# Altium PCB 32X35雷达微动一体板V0.6.PcbDoc (part 1 of 2)
Units mil, origin at the board's own origin, x right, y up, seen from the top; angles counter-clockwise.
Board outline 1258.74 x 1380 mil, 2 copper layers (Top Layer, Bottom Layer); 54 components, 40 nets, 229 pads, 39 vias.
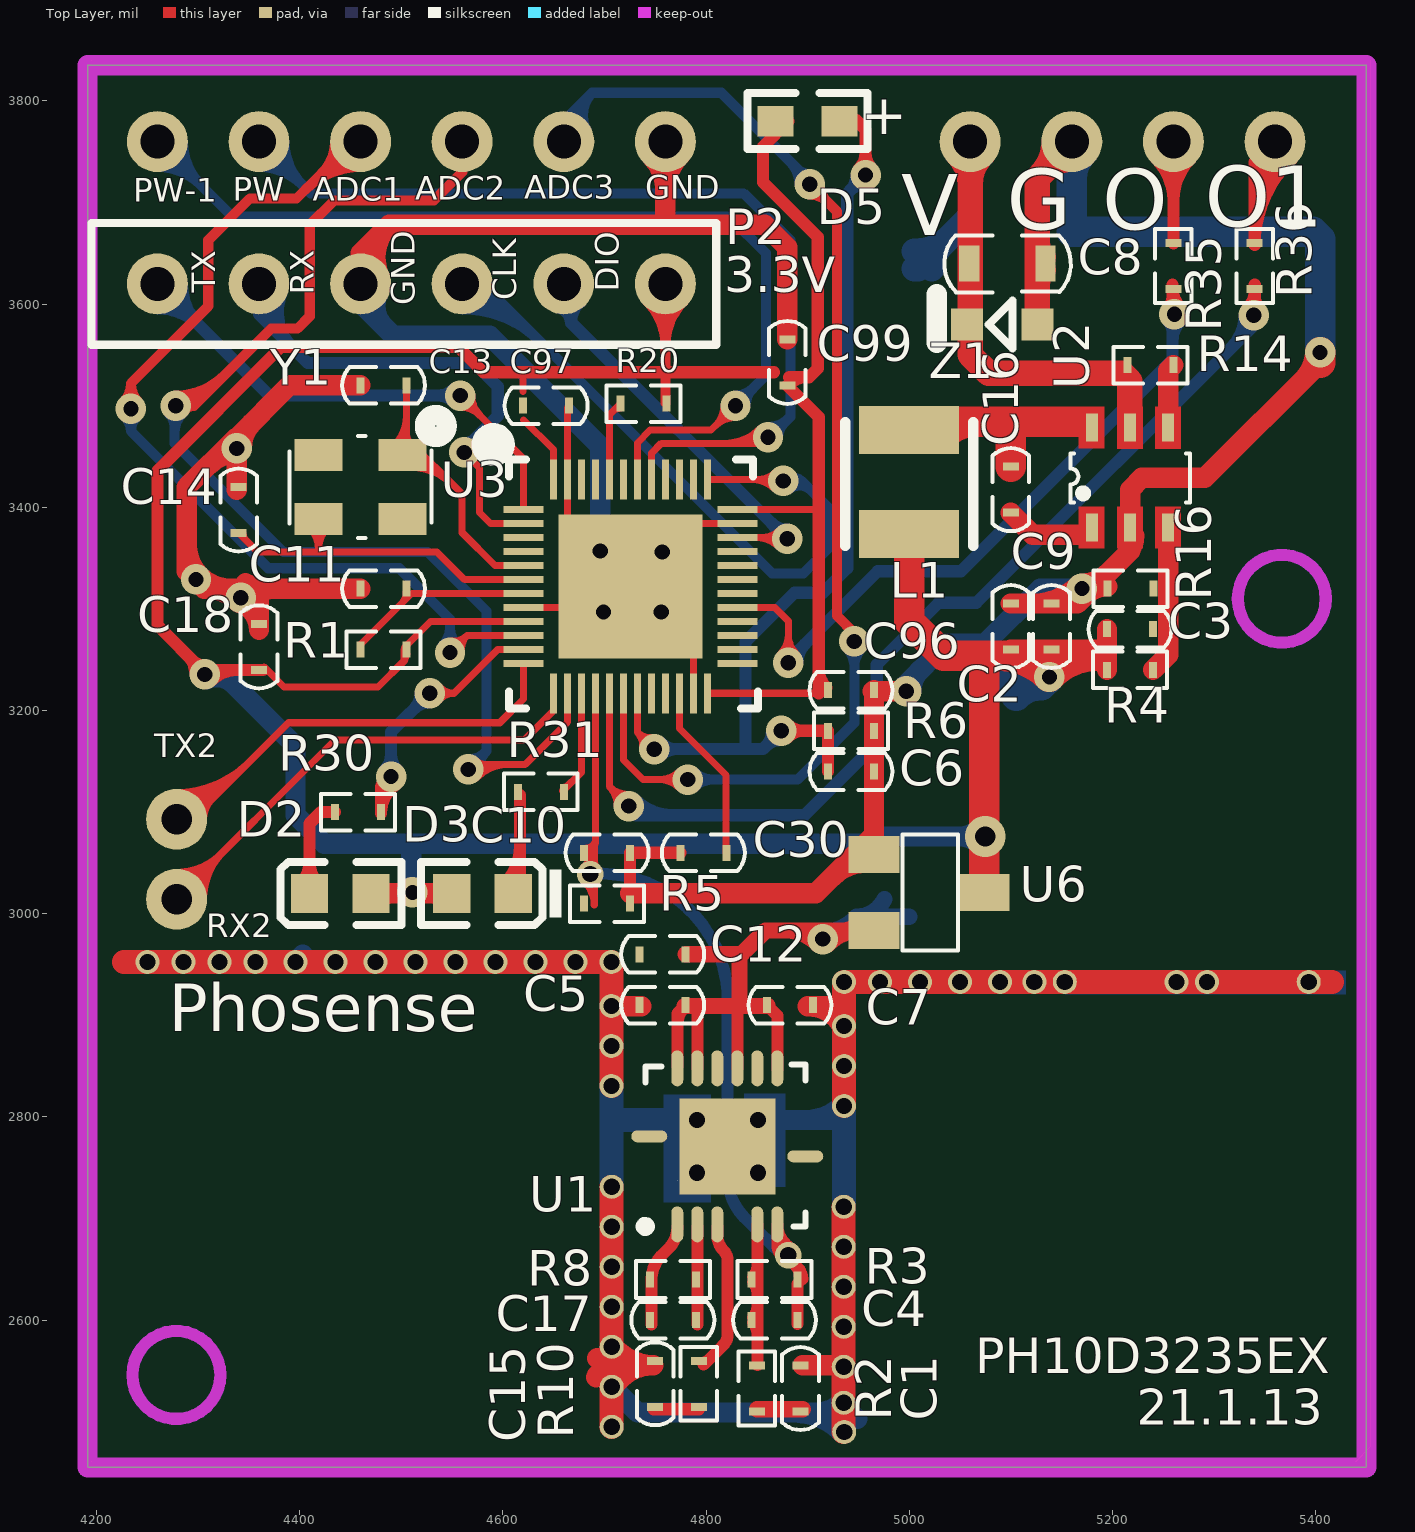
[diagram p0: Top Layer view]
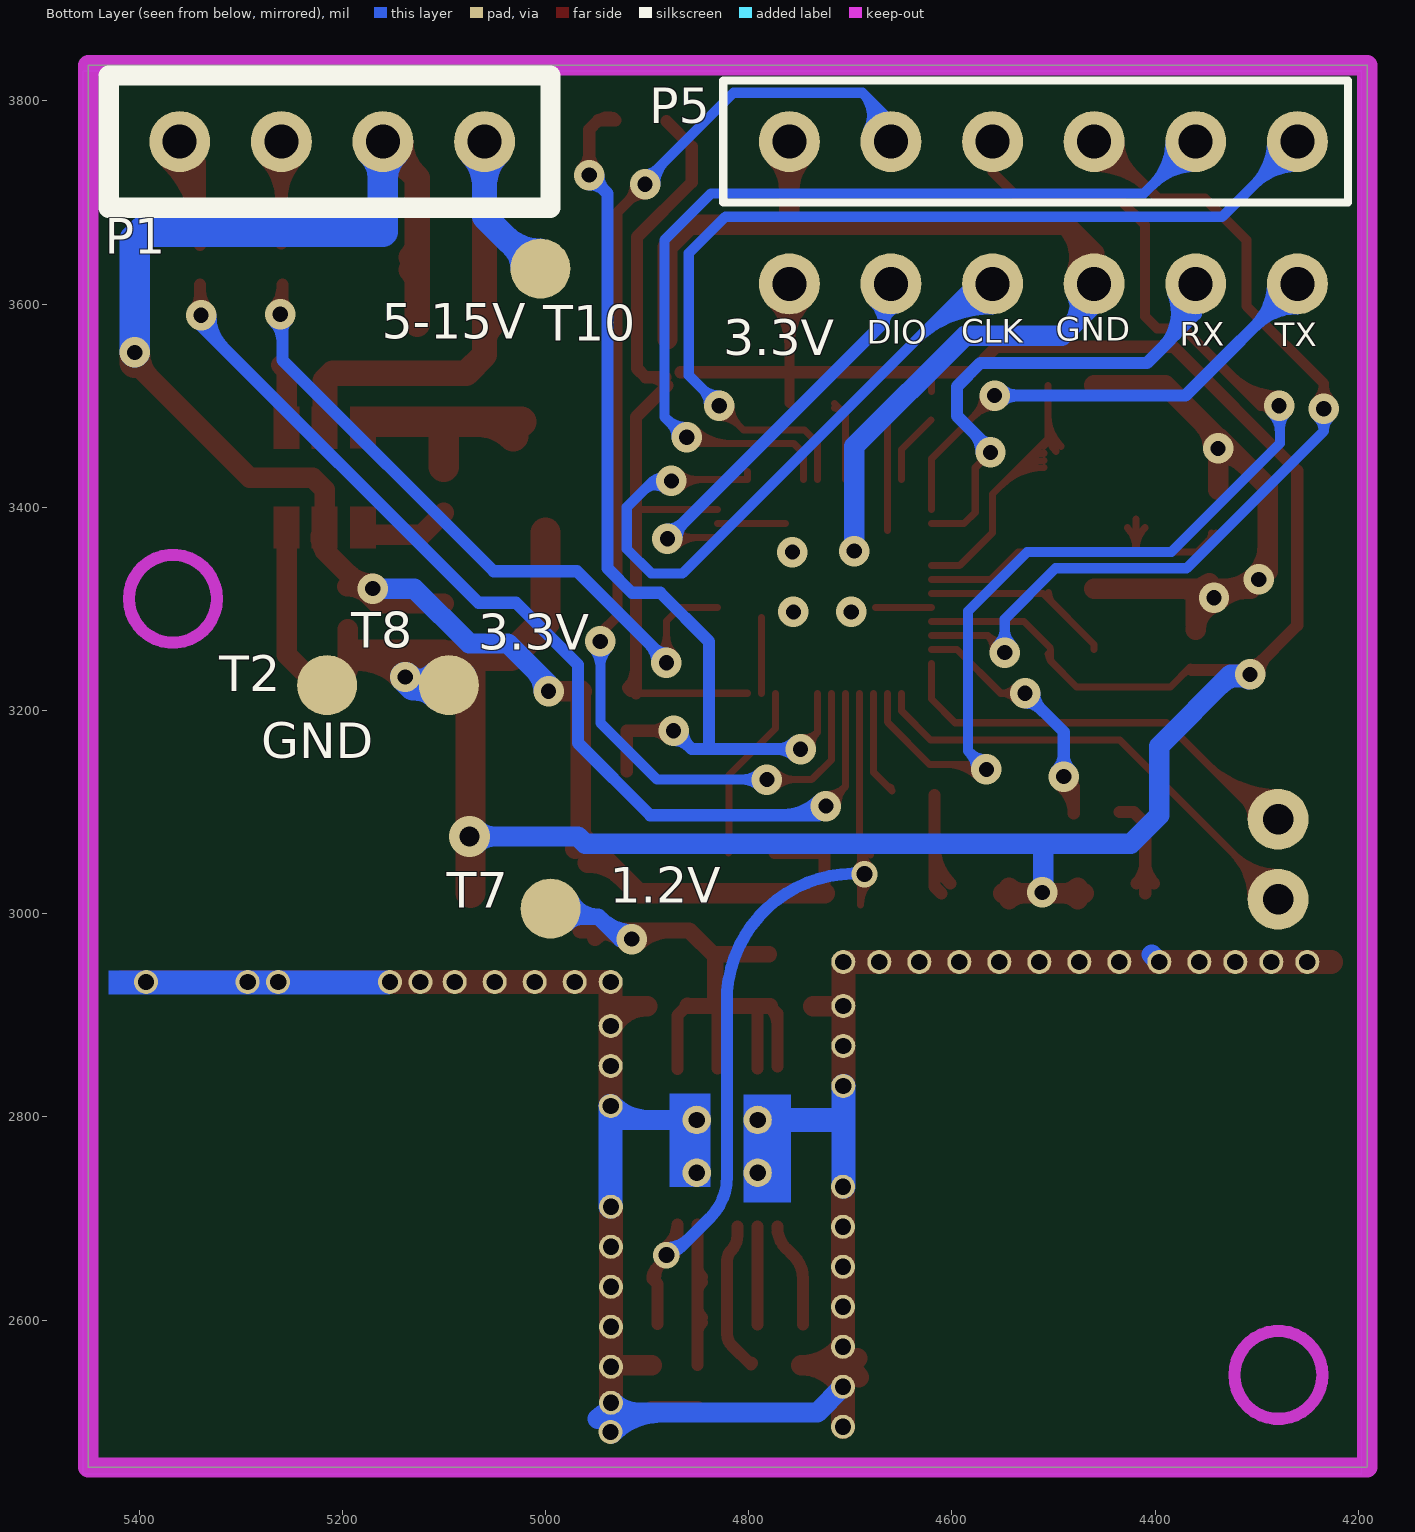
[diagram p1: Bottom Layer view, seen from below]

## Layer stack, top to bottom
Top Layer: signal copper 1.4
Dielectric: dielectric 12.6, FR-4, Dk 4.8
Bottom Layer: signal copper 1.4

## Board outline
4191.26,3835 5450,3835 5450,2455 4191.26,2455 4191.26,3835

## Design rules (kind name [scope] priority, off if disabled: settings)
Clearance [All] p0: scope1count=1 scope1_0_kind=Board scope1_0_value=Board scope2count=1 scope2_0_kind=Board scope2_0_value=Board commentlength=0 gap=6
Clearance Clearance_1 [All] p0: scope1count=1 scope1_0_kind=Net scope1_0_value=GND scope2count=1 scope2_0_kind=Layer scope2_0_value=TOP commentlength=0 gap=10
Clearance Clearance_1 [InNet('GND') vs OnLayer('Keep-Out Layer')] p1: gap=10
Clearance [All] p2: gap=6
ComponentClearance [All] p0: scope1count=1 scope1_0_kind=Board scope1_0_value=Board scope2count=1 scope2_0_kind=Board scope2_0_value=Board commentlength=0 gap=10 collisioncheckmode=3
ComponentClearance [All] p1: gap=10 collisioncheckmode=3 verticalgap=10
DiffPairsRouting [All] p0: scope1count=1 scope1_0_kind=Board scope1_0_value=Board scope2count=1 scope2_0_kind=Board scope2_0_value=Board commentlength=0
FanoutControl Fanout_BGA [All] p0 off: scope1count=1 scope1_0_kind=Board scope1_0_value=Board scope2count=1 scope2_0_kind=Board scope2_0_value=Board commentlength=69 // Protel DXP Scope 1 Expression Was: IsBGA   Fanout_BGA (Default Rule)
FanoutControl Fanout_LCC [All] p0 off: scope1count=1 scope1_0_kind=Board scope1_0_value=Board scope2count=1 scope2_0_kind=Board scope2_0_value=Board commentlength=69 // Protel DXP Scope 1 Expression Was: IsLCC   Fanout_LCC (Default Rule)
FanoutControl Fanout_SOIC [All] p0 off: scope1count=1 scope1_0_kind=Board scope1_0_value=Board scope2count=1 scope2_0_kind=Board scope2_0_value=Board commentlength=71 // Protel DXP Scope 1 Expression Was: IsSOIC   Fanout_SOIC (Default Rule)
FanoutControl Fanout_Small [All] p0 off: scope1count=1 scope1_0_kind=Board scope1_0_value=Board scope2count=1 scope2_0_kind=Board scope2_0_value=Board commentlength=84 // Protel DXP Scope 1 Expression Was: (CompPinCount < 5)   Fanout_Small (Default Rule)
FanoutControl Fanout_Default [All] p0: scope1count=1 scope1_0_kind=Board scope1_0_value=Board scope2count=1 scope2_0_kind=Board scope2_0_value=Board commentlength=30 // Fanout_Default (Default Rule)
Height [All] p0: scope1count=1 scope1_0_kind=Board scope1_0_value=Board scope2count=1 scope2_0_kind=Board scope2_0_value=Board commentlength=0
HoleSize [All] p0: scope1count=1 scope1_0_kind=Board scope1_0_value=Board scope2count=1 scope2_0_kind=Board scope2_0_value=Board commentlength=0 absolutevalues=TRUE maxlimit=100 minlimit=1 maxpercent=80.000 minpercent=20.000
LayerPairs [All] p0: scope1count=1 scope1_0_kind=Board scope1_0_value=Board scope2count=1 scope2_0_kind=Board scope2_0_value=Board commentlength=0 enforce=TRUE
PasteMaskExpansion [All] p0: scope1count=1 scope1_0_kind=Board scope1_0_value=Board scope2count=1 scope2_0_kind=Board scope2_0_value=Board commentlength=0 expansion=0
PlaneClearance [All] p0: scope1count=1 scope1_0_kind=Board scope1_0_value=Board scope2count=1 scope2_0_kind=Board scope2_0_value=Board commentlength=0 clearance=20
PlaneConnect [All] p0: scope1count=1 scope1_0_kind=Board scope1_0_value=Board scope2count=1 scope2_0_kind=Board scope2_0_value=Board commentlength=0 planeconnectstyle=Direct reliefexpansion=20 reliefentries=4 reliefconductorwidth=10 reliefairgap=10
PlaneConnect [All] p1: planeconnectstyle=Direct reliefexpansion=20 reliefentries=4 reliefconductorwidth=10 reliefairgap=10
PolygonConnect [All] p0: scope1count=1 scope1_0_kind=Board scope1_0_value=Board scope2count=1 scope2_0_kind=Board scope2_0_value=Board commentlength=0 connectstyle=Direct reliefconductorwidth=10 reliefentries=4 polygonreliefangle="90 Angle"
PolygonConnect [All] p1: connectstyle=Direct reliefconductorwidth=10 reliefentries=4 polygonreliefangle="90 Angle"
RoutingCorners [All] p0: scope1count=1 scope1_0_kind=Board scope1_0_value=Board scope2count=1 scope2_0_kind=Board scope2_0_value=Board commentlength=0 cornerstyle=45-Degree minsetback=100 maxsetback=100
RoutingLayers [All] p0: scope1count=1 scope1_0_kind=Board scope1_0_value=Board scope2count=1 scope2_0_kind=Board scope2_0_value=Board commentlength=0 top layer=Automatic bottom layer=Automatic
RoutingPriority [All] p0: scope1count=1 scope1_0_kind=Board scope1_0_value=Board scope2count=1 scope2_0_kind=Board scope2_0_value=Board commentlength=0
RoutingTopology [All] p0: scope1count=1 scope1_0_kind=Board scope1_0_value=Board scope2count=1 scope2_0_kind=Board scope2_0_value=Board commentlength=0 topology=Shortest
RoutingVias [All] p0: scope1count=1 scope1_0_kind=Board scope1_0_value=Board scope2count=1 scope2_0_kind=Board scope2_0_value=Board commentlength=0 holewidth=28 width=50 viastyle="Through Hole" minholewidth=15 minwidth=24 maxholewidth=28 maxwidth=50
RoutingVias [All] p1: holewidth=28 width=50 viastyle="Through Hole" minholewidth=15 minwidth=24 maxholewidth=28 maxwidth=50
ShortCircuit [All] p0: scope1count=1 scope1_0_kind=Board scope1_0_value=Board scope2count=1 scope2_0_kind=Board scope2_0_value=Board commentlength=0 allowed=FALSE
SolderMaskExpansion [All] p0: scope1count=1 scope1_0_kind=Board scope1_0_value=Board scope2count=1 scope2_0_kind=Board scope2_0_value=Board commentlength=0 expansion=4
SolderMaskExpansion [All] p1: expansion=4
TestPointUsage [All] p0: scope1count=1 scope1_0_kind=Board scope1_0_value=Board scope2count=1 scope2_0_kind=Board scope2_0_value=Board commentlength=0 valid=0 allowmultiple=FALSE
TestPointUsage [All] p1: valid=0 allowmultiple=FALSE
Testpoint [All] p0: scope1count=1 scope1_0_kind=Board scope1_0_value=Board scope2count=1 scope2_0_kind=Board scope2_0_value=Board commentlength=0 side=15 testpointundercomponent=TRUE minsize=40 maxsize=100 preferedsize=60 minholesize=0 maxholesize=40 preferedholesize=32 testpointgrid=1 style=1023 order=0123456789
Testpoint [All] p1: side=15 testpointundercomponent=TRUE minsize=40 maxsize=100 preferedsize=60 minholesize=0 maxholesize=40 preferedholesize=32 testpointgrid=1 style=1023 order=0123456789
UnRoutedNet [All] p0: scope1count=1 scope1_0_kind=Board scope1_0_value=Board scope2count=1 scope2_0_kind=Board scope2_0_value=Board commentlength=0
Width [All] p0: scope1count=1 scope1_0_kind=Board scope1_0_value=Board scope2count=1 scope2_0_kind=Board scope2_0_value=Board commentlength=0 maxlimit=90 minlimit=7 preferedwidth=10
Width [All] p1: maxlimit=90 minlimit=7 preferedwidth=10
17 further rules are at their usual default settings.

## Components (designator, comment, footprint, x,y, rotation, side; value= is the part's Value field where it differs from the comment)
C1 "10uF" C0402 4893,2510 r90 top
C2 "10uF" C0402 5100,3260 r90 top
C3 "22pF" C0402 5240,3280 r180 top
C4 "1nF/NA" C0402 4890,2600 r180 top
C5 "0.5pF" C0402 4780,2910 r180 top
C6 "0.1uF" C0402 4920,3140 r0 top
C7 "0.1uF" C0402 4860,2910 r0 top
C8 "10uF/16V" C0603 5060,3640 r0 top
C9 "10uF" C0402 5140,3260 r90 top
C10 "0.1uF" C0402 4680,3060 r0 top
C11 "100nF" C0402 4460,3320 r0 top
C12 "10uF" C0402 4780,2960 r180 top
C13 "12pF" C0402 4460,3520 r0 top
C14 "12pF" C0402 4340,3420 r270 top
C15 "1nF" C0402 4750,2560 r270 top
C16 "0.1uF" C0402 5100,3440 r270 top
C17 "1nF" C0402 4790,2600 r180 top
C18 "10uF/6.3V" C0402 4360,3240 r90 top
C30 "100nF" C0402 4820,3060 r180 top
C96 "0.1uF/50V" C0402 4920,3220 r0 top
C97 "0.1uF/50V" C0402 4620,3500 r0 top
C99 "0.1uF/50V" C0402 4880,3520 r90 top
D2 "红灯" LC-0603_LED_S1 4440,3020 r0 top
D3 "绿灯" LC-0603_LED_S1 4580,3020 r180 top
D5 "PT19-21C" LED-0603 4900,3780 r180 top
L1 "PRS3015-100MT" PRS3015 5000,3480 r270 top
P1 "DIP1X4-2.54mm" DIP1X4-2.54mm 5060,3760 r0 bottom
P2 "DIP1X6-2.54mm" DIP1X6-2.54 4760,3620 r180 top
P5 "DIP1X6-2.54mm" DIP1X6-2.54 4260,3760 r0 bottom
R1 "4.7KΩ" R0402 4460,3260 r0 top
R2 "10K" R0402 4850,2510 r90 top
R3 "5.1M" R0402 4890,2640 r180 top
R4 "100K" R0402 5240,3240 r180 top
R5 "47k" R0402 4680,3010 r0 top
R6 "47k" R0402 4920,3180 r0 top
R8 "5.1k" R0402 4790,2640 r180 top
R10 "5.1k" R0402 4793,2560 r270 top
R14 "47k" R0402 5260,3540 r180 top
R16 "22.1K" R0402 5195,3320 r0 top
R20 "4.7K" R0402 4761,3502 r180 top
R30 "1KΩ" R0402 4480,3100 r180 top
R31 "1KΩ" R0402 4660,3120 r180 top
R35 "100R" R0402 5260,3660 r270 top
R36 "100R" R0402 5340,3615 r90 top
T2 "" TestPoints 5220,3220 r180 bottom
T7 "" TestPoints 5000,3000 r180 bottom
T8 "" TestPoints 5100,3220 r180 bottom
T10 "" TestPoints 5000,3640 r0 bottom
U1 "XBR816C" XBR816 4939,2712 r90 top locked
U2 "SY8120B1ABC" SOT-23-6 5180,3380 r90 top
U3 "HC32F460JEUA-QFN48TR" QFN48-5X5mm 4621,3322 r0 top
U6 "ME6216A12M3G" SOT-23-L 4965.28,3058.28 r0 top
Y1 "8MHZ-1C208000CE0R" OSC-SMD_3225 4460,3420 r180 top
Z1 "SESD3Z15C" SOD323 5045,3580 r0 top

## Footprints (in the part's own frame and the unit in brackets; to place one, negate y for a bottom-side part, rotate by r counter-clockwise, add the part's x,y. Pads: shape width x height; smd on the part's side, far side on the other; paste and mask are expansions set on the pad)
C0402 [mm]
  rect 0.2x0.4 smd: 1(0,0) 2(1.15,0)
  silkscreen extent -0.46,-0.46 1.61,0.46
C0603 [mil]
  rect 19.8x35.55 smd: 1(-0.92,0) 2(74,0)
  silkscreen extent -25,-28 99,28
DIP1X4-2.54mm [mil]
  round 60 hole 33.46: 1(0,0) 2(100,0) 3(200,0) 4(300,0)
  silkscreen extent -65,-65 370,65
DIP1X6-2.54 [mil]
  round 60 hole 33.46: 1(0,0) 2(100,0) 3(200,0) 4(300,0) 5(400,0) 6(500,0)
  silkscreen extent -50,-60 565,60
LC-0603_LED_S1 [mm]
  rect 0.93x0.98 smd: A(0.77,0) K(-0.77,0)
  silkscreen extent -1.5,-0.79 1.54,0.79
LED-0603 [mm]
  rect 0.9x0.762 smd: 1(-0.8,0) 2(0.8,0)
  silkscreen extent -1.5,-0.7 1.5,0.7
OSC-SMD_3225 [mm] "OSC-SMD-3225"
  rect 1.2x0.8 smd: 1(-1.05,-0.8) 2(1.05,-0.8) 3(1.05,0.8) 4(-1.05,0.8)
  silkscreen extent -1.98,-1.37 1.78,1.27
PRS3015 [mm]
  rect 1.2x2.5 smd: 1(0.1,0) 2(2.7,0)
  silkscreen extent -0.1,-1.6 3,1.6
QFN48-5X5mm [mm] "QFN48-5X5mm"
  rect 1x0.18 smd: 1(-0.02,1.925) 2(-0.02,1.575) 3(-0.02,1.225) 4(-0.02,0.875) 5(-0.02,0.525) 6(-0.02,0.175) 7(-0.02,-0.175) 8(-0.02,-0.525) 9(-0.02,-0.875) 10(-0.02,-1.225) 11(-0.02,-1.575) 12(-0.02,-1.925) 25(5.33,-1.925) 26(5.33,-1.575) 27(5.33,-1.225) 28(5.33,-0.875) 29(5.33,-0.525) 30(5.33,-0.175) 31(5.33,0.175) 32(5.33,0.525) 33(5.33,0.875) 34(5.33,1.225) 35(5.33,1.575) 36(5.33,1.925)
  rect 0.18x1 smd: 13(0.73,-2.675) 14(1.08,-2.675) 15(1.43,-2.675) 16(1.78,-2.675) 17(2.13,-2.675) 18(2.48,-2.675) 19(2.83,-2.675) 20(3.18,-2.675) 21(3.53,-2.675) 22(3.88,-2.675) 23(4.23,-2.675) 24(4.58,-2.667) 37(4.58,2.675) 38(4.23,2.675) 39(3.88,2.675) 40(3.53,2.675) 41(3.18,2.675) 42(2.83,2.675) 43(2.48,2.675) 44(2.13,2.675) 45(1.78,2.675) 46(1.43,2.675) 47(1.08,2.675) 48(0.73,2.675)
  rect 3.6x3.6 smd: 49(2.655,0)
  silkscreen extent -1.07,-3.05 5.84,3.7
R0402 [mm]
  rect 0.2x0.4 smd: 1(0,0) 2(1.15,0)
  silkscreen extent -0.35,-0.46 1.5,0.46
SOD323 [mm]
  rect 0.8x0.8 smd: A(2.06,0) K(0.3,0)
  silkscreen extent 0.84,-0.6 1.44,0.6
SOT-23-6 [mm]
  rect 0.7x0.3 smd: 1(0,0) 2(0,-0.95) 3(0,-1.9) 4(2.5,-1.9) 5(2.5,-0.95) 6(2.5,0)
  Top Layer region: 1.972,-2.226 3.025,-2.226 3.025,-1.573 1.972,-1.573
  Top Layer region: 1.972,-1.276 3.025,-1.276 3.025,-0.623 1.972,-0.623
  Top Layer region: 1.974,-0.313 3.027,-0.313 3.027,0.34 1.974,0.34
  Top Layer region: -0.527,-2.226 0.526,-2.226 0.526,-1.573 -0.527,-1.573
  Top Layer region: -0.527,-1.276 0.526,-1.276 0.526,-0.623 -0.527,-0.623
  Top Layer region: -0.526,-0.313 0.527,-0.313 0.527,0.34 -0.526,0.34
  silkscreen extent 0.63,-2.45 1.86,0.54
SOT-23-L [mil]
  rect 50x36 smd: 1(0,0) 2(0,-74.8) 3(108.54,-37.4)
  silkscreen extent 28,-94 83,20
TestPoints [mil] "TestPoints"
  round 59.06 smd: 1(5,5)
XBR816 [mm] "QFN24"
  oval 0.9x0.3 smd: 1(-0.45,4.25) 2(-0.45,3.75) 3(-0.45,3.25) 5(-0.45,2.25) 6(-0.45,1.75) 13(3.45,1.75) 14(3.45,2.25) 15(3.45,2.75) 16(3.45,3.25) 17(3.45,3.75) 18(3.45,4.25)
  oval 0.3x0.9 smd: 10(1.25,1.05) 21(1.75,4.95)
  rect 2.4x2.4 smd: 25(1.5,3)
  silkscreen extent -0.61,1.05 3.55,5.16

## Part data
C1 C2 C3 C4 C5 C6 C7 C8 C9 C10 C12 C15 C16 C17 C30: library part Cap, "Capacitor"
C11: library part "0402 100nF (104) 10% 16V", "贴片电容"
C13 C14: library part "0402 22pF (220) 5% 50V", "贴片电容"
C18 C96 C97 C99: library part "0402 2.2nF (222) 10% 50V", "贴片电容"
D2 D3: library part "0603 红灯", "发光二极管"
D5: library part "Photo Sen", "Photosensitive Diode"
L1: library part Inductor, "Inductor"
P1: library part DIP4-2.54mm
R1 R35 R36: library part "0402 4.7KΩ (4701) 1%", "贴片电阻"
R2 R3 R4 R5 R6 R8 R10 R14 R16 R20: library part Res2, "Resistor"
R30 R31: library part "0402 1KΩ (1001) 1%", "贴片电阻"
T2 T7 T8 T10: library part TestPoints, "TestPoints"
U1: library part XBR1000_24_1
U2: library part H9108
U3: library part HC32F460JETA-LQFP48
U6: library part SSP6206
Y1: library part "SMD-3225_4P  25MHZ 12PF 10PPM", "贴片晶振"
Z1: library part "D Zener", "Zener Diode"

## Free pads (board coordinates)
  round 60 hole 30: 0(4279,3093) 1(4279,3014.26)
  round 23.62 hole 16: 1(4250.17,2952.5) 1(4285.61,2952.5) 1(4321.06,2952.5) 1(4356.49,2952.5) 1(4395.86,2952.5) 1(4435.23,2952.5) 1(4474.6,2952.5) 1(4513.97,2952.5) 1(4553.34,2952.5) 1(4592.71,2952.5) 1(4632.08,2952.5) 1(4671.45,2952.5) 1(4706.88,2830.45) 1(4706.88,2869.82) 1(4706.88,2909.19) 1(4706.88,2952.5) 1(4707.2,2495.02) 1(4707.2,2534.39) 1(4707.2,2573.76) 1(4707.2,2613.13) 1(4707.2,2652.5) 1(4707.2,2691.87) 1(4707.2,2731.24) 1(4935.54,2518.64) 1(4935.54,2554.07) 1(4935.54,2593.44) 1(4935.54,2632.81) 1(4935.54,2672.18) 1(4935.54,2711.55) 1(4935.86,2932.81) 1(4935.86,2810.76) 1(4935.86,2850.13) 1(4935.86,2889.5) 1(4936,2490) 1(4971.29,2932.8) 1(5010.66,2932.8) 1(5050.03,2932.8) 1(5089.4,2932.81) 1(5123.17,2932.81) 1(5153.17,2932.81) 1(5263.17,2932.81) 1(5293.17,2932.81) 1(5393.17,2932.81)
  round 28 hole 16: 1(4791.2,2745.02) 1(4791.2,2797.02) 1(4851.17,2745.02) 1(4851.17,2797.02)

## Via types
v1: diameter 30, hole 15, Top Layer to Bottom Layer, 36 vias
v2: diameter 26, hole 16, Top Layer to Bottom Layer, tented both sides, 2 vias
v3: diameter 40, hole 20, Top Layer to Bottom Layer, 1 vias

## Nets (pads, with @x,y where several pads share a name; then routed paths per layer and width w, separated by ;. In a path a pad name is that pad's centre, name@x,y a point inside that pad or via, vN(x,y) a via of type N, cw(c..) or ccw(c..) an arc to the next point about the centre after c; other vN are vias at no path point)
1.2V: C5.1 C7.1 C12.1 T7.1 U1.13 U1.15 U1.17 U1.18 U6.2 | length 1130
  Top Layer w11.8: U1.18@4771.79,2849.74 4771.79,2901.79 C5.1@4779.02,2909.02 ; U1.17@4791.47,2847.83 4791.47,2909.02 ; U1.15@4830.84,2847.83 4830.84,2909.02 ; C7.1@4860.37,2909.63 4870.21,2899.79 U1.13@4870.21,2847.38 ; 4771.79,2890.98 cw(c4795.09,2890.98) 4778.61,2907.45 ccw(c4795.09,2890.98) 4771.79,2890.98 ; 4771.79,2896.8 cw(c4783.73,2896.8) 4779.27,2907.88 ccw(c4783.73,2896.8) 4771.79,2896.8
  Top Layer w15.75: C5.1@4779.02,2909.02 4859.76,2909.02 C7.1@4860.37,2909.63
  Top Layer w16: C12.1@4780,2960 4831,2960 ; 4833,2909.02 4833,2958 4858.47,2983.47 U6.2@4965.28,2983.47 ; 4934.13,2983.47 ccw(c4934.13,3007.61) 4951.2,2990.54 cw(c4934.13,3007.61) 4934.13,2983.47 ; 4934.13,2983.47 cw(c4934.13,2959.33) 4951.2,2976.4 ccw(c4934.13,2959.33) 4934.13,2983.47 ; 4877.65,2983.47 cw(c4877.65,2937.65) 4910.05,2970.05 ccw(c4877.65,2937.65) 4877.65,2983.47 ; v1@4919.95,2970.05 cw(c4952.35,2937.65) 4952.35,2983.47 ccw(c4952.35,2937.65) v1@4919.95,2970.05
  Bottom Layer w16: v1(4915,2975) 4926,2975 4948,2997 ; T7.1@5000,2997 4948,2997 ; 4948,2997 ccw(c4948,3027.64) 4975.61,3014.34 cw(c4948,3027.64) 4948,2997 ; v1@4915,2982 ccw(c4915,3025.46) 4945.73,2994.73 cw(c4915,3025.46) v1@4915,2982 ; 4962.34,2997 cw(c4962.34,2972.34) 4979.78,2989.78 ccw(c4962.34,2972.34) 4962.34,2997
3.3V: C2.1 C3.2 C9.1 C18.1 C96.1 C97.1 C99.1 D2.A D3.A D5.2 L1.2 P2.1 R1.2 R4.2 R20.1 T8.1 U3.9 U3.24 U3.36 U3.48 U6.3 | length 5125.4
  Top Layer w7: C18.1@4365,3243 4384.76,3223.24 4477.24,3223.24 4503,3249 R1.2@4503,3260 ; R1.2@4503.32,3261.95 4528.93,3287.55 U3.9@4620.2,3287.55 ; 4620,3513.86 4620,3533 ; 4620.47,3486.1 4649.74,3456.83 U3.48@4649.74,3427.32 ; U3.24@4801.31,3217 4911,3217 ; U3.36@4830.84,3397.79 4904,3397.79 ; C96.1@4917,3217 C96.1@4920,3220 ; C18.1@4363.94,3239.56 cw(c4363.94,3228.7) 4371.62,3236.38 ccw(c4363.94,3228.7) C18.1@4363.94,3239.56 ; 4501.14,3247.14 ccw(c4492.23,3256.06) 4504.84,3256.06 cw(c4492.23,3256.06) 4501.14,3247.14 ; 4503,3249.51 cw(c4511.82,3249.51) 4505.58,3255.75 ccw(c4511.82,3249.51) 4503,3249.51
  Top Layer w10: R20.1@4760,3503 P2.1@4760,3620 ; 4760,3559.64 ccw(c4699.64,3559.64) 4742.32,3602.32 cw(c4699.64,3559.64) 4760,3559.64 ; 4760,3559.64 cw(c4820.36,3559.64) 4777.68,3602.32 ccw(c4820.36,3559.64) 4760,3559.64 ; 4760,3583.79 ccw(c4723.79,3583.79) 4749.39,3609.39 cw(c4723.79,3583.79) 4760,3583.79 ; 4760,3583.79 cw(c4796.21,3583.79) 4770.61,3609.39 ccw(c4796.21,3583.79) 4760,3583.79
  Top Layer w12: C18.1@4364,3240 4304,3240 4260,3284 4260,3436 4382,3558 4556,3558 4581,3533 4867,3533 ; C99.1@4880,3520 4911,3489 4911,3217 ; D5.2@4881,3780 4856,3755 4856,3720 4910,3666 4910,3536.57 4901.43,3528 4882,3528 ; 4289.72,3254.28 cw(c4270.94,3235.5) 4297.5,3235.5 ccw(c4270.94,3235.5) 4289.72,3254.28 ; 4294.55,3249.45 ccw(c4306.5,3261.4) 4306.5,3244.5 cw(c4306.5,3261.4) 4294.55,3249.45 ; v1@4312.86,3229.14 cw(c4339.09,3202.91) 4339.09,3240 ccw(c4339.09,3202.91) v1@4312.86,3229.14 ; C99.1@4882.48,3521.46 cw(c4898.27,3505.67) 4898.27,3528 ccw(c4898.27,3505.67) C99.1@4882.48,3521.46 ; 4911,3240.68 ccw(c4936.75,3240.68) 4918.54,3222.48 cw(c4936.75,3240.68) 4911,3240.68
  Top Layer w20: D2.A@4470.32,3020 D3.A@4549.68,3020 ; C2.1@5100,3260 5193.72,3260 5194.72,3261 ; R4.2@5194.72,3240 C3.2@5194.72,3280 ; 4490.37,3020 ccw(c4490.37,2999.94) 4476.19,3014.13 cw(c4490.37,2999.94) 4490.37,3020 ; 4490.37,3020 cw(c4490.37,3040.06) 4476.19,3025.87 ccw(c4490.37,3040.06) 4490.37,3020 ; 4529.63,3020 ccw(c4529.63,3040.06) 4543.81,3025.87 cw(c4529.63,3040.06) 4529.63,3020 ; 4529.63,3020 cw(c4529.63,2999.94) 4543.81,3014.13 ccw(c4529.63,2999.94) 4529.63,3020
  Top Layer w30: L1.2@5000,3375 5000,3288 5034.14,3253.86 5184.8,3253.86 ; 5070,3253.86 5073.82,3250.04 U6.3@5073.82,3020.87 ; v1(5138,3233) cw(c5184.8,3190.93) 5184.8,3253.86 ; v1(5138,3233) ccw(c5087.64,3182.64) 5087.64,3253.86 cw(c5087.64,3182.64) v1(5138,3233) ; v1(5138,3233) cw(c5184.8,3190.93) 5184.8,3253.86
  Bottom Layer w20: v1(4306.5,3235.5) 4325.5,3235.5 4396,3165 4396,3097 4424,3069 4961,3069 4968,3076 v3(5074.82,3076) ; v1@4308.53,3230.93 cw(c4318.17,3209.17) 4335,3226 ; v1@4510,3022 4510,3069 ; 5050.68,3076 ccw(c5050.68,3100.14) 5067.75,3083.07 cw(c5050.68,3100.14) 5050.68,3076 ; 5050.68,3076 cw(c5050.68,3051.86) 5067.75,3068.93 ccw(c5050.68,3051.86) 5050.68,3076
  Bottom Layer w30: T8.1@5082.86,3233 T8.1@5088,3233 ; T8.1@5095,3225 v1@5130,3225 ; v1@5130,3225 ccw(c5130,3190.11) 5105.29,3214.74 cw(c5130,3190.11) v1@5130,3225 ; v1@5130,3225 cw(c5130,3259.89) 5105.29,3235.26 ccw(c5130,3259.89) v1@5130,3225 ; v1@5130,3225 v1(5138,3233) ; v1(5138,3233) cw(c5118.69,3252.31) 5118.69,3225 ccw(c5118.69,3252.31) v1(5138,3233)
  other v1: 4511,3021
5-15V: C8.1 P1.1 R14.2 T10.1 U2.5 Z1.K | length 1013.5
  Top Layer w25: P1.1@5060,3760 5060,3550 5078,3532 5209.3,3532 5217,3524.3 U2.5@5217,3492 ; 5060,3717.75 ccw(c5017.75,3717.75) 5047.63,3747.63 cw(c5017.75,3717.75) 5060,3717.75 ; 5060,3717.75 cw(c5102.25,3717.75) 5072.37,3747.63 ccw(c5102.25,3717.75) 5060,3717.75 ; Z1.K@5054.51,3577.7 cw(c5041.27,3564.46) 5060,3564.46 ccw(c5041.27,3564.46) Z1.K@5054.51,3577.7 ; Z1.K@5054.51,3582.3 ccw(c5041.27,3595.54) 5060,3595.54 cw(c5041.27,3595.54) Z1.K@5054.51,3582.3
  Bottom Layer w25: T10.1@5005,3635 5009,3635 5060,3686 P1.1@5060,3760 ; 5060,3717.75 ccw(c5017.75,3717.75) 5047.63,3747.63 cw(c5017.75,3717.75) 5060,3717.75 ; 5060,3717.75 cw(c5102.25,3717.75) 5072.37,3747.63 ccw(c5102.25,3717.75) 5060,3717.75 ; T10.1@5005,3652.03 ccw(c5005,3702.79) 5040.9,3666.9 cw(c5005,3702.79) T10.1@5005,3652.03 ; T10.1@5022.03,3635 cw(c5053.48,3635) 5031.24,3657.24 ccw(c5053.48,3635) T10.1@5022.03,3635
AD: C4.1 C10.1 R3.1 R5.1 U1.6 U3.16 | length 1210.9
  Top Layer w7: C10.1@4680,3058 4691.08,3069.08 U3.16@4691.08,3216.68 ; 4690,3009 4690,3069 ; 4690,3069 cw(c4659.42,3069) 4679.7,3046.11 ccw(c4659.42,3069) 4690,3069 ; v2@4679.65,3031.93 cw(c4658.83,3008.74) 4690,3008.74 ccw(c4658.83,3008.74) v2@4679.65,3031.93 ; C10.1@4680,3064.37 ccw(c4680,3079.76) 4690.88,3068.88 cw(c4680,3079.76) C10.1@4680,3064.37 ; v2@4684.33,3037.14 cw(c4672.92,3024.43) 4690,3024.43 ccw(c4672.92,3024.43) v2@4684.33,3037.14 ; v2@4684.34,3040.87 ccw(c4673.2,3053.44) 4690,3053.44 cw(c4673.2,3053.44) v2@4684.34,3040.87 ; 4690,3025.72 cw(c4699.28,3025.72) 4692.72,3032.28 ccw(c4699.28,3025.72) 4690,3025.72 ; 4690,3052.28 ccw(c4699.28,3052.28) 4692.72,3045.72 cw(c4699.28,3052.28) 4690,3052.28
  Top Layer w11.8: U1.6@4870.21,2678.02 U1.6@4870.21,2694.23 ; U1.6@4870.21,2692.26 4870.21,2680.02 ccw(c4890.54,2680.02) 4876.17,2665.65 4890.33,2651.48 cw(c4879.5,2640.65) 4894.82,2640.65 4889.82,2635.65 C4.1@4889.82,2595.96 ; U1.6@4870.21,2694.23 ccw(c4897.6,2694.23) 4884.42,2670.22 cw(c4897.6,2694.23) U1.6@4870.21,2694.23 ; 4870.21,2674.29 ccw(c4886.65,2674.29) 4878.74,2659.88 cw(c4886.65,2674.29) 4870.21,2674.29 ; v2@4887.78,2654.03 cw(c4877.69,2643.94) 4891.96,2643.94 ccw(c4877.69,2643.94) v2@4887.78,2654.03
  Bottom Layer w11.8: v2(4686,3039) cw(c4696.08,2913.91) 4821.17,2923.99 4821.17,2741.65 ccw(c4879.11,2741.65) 4838.14,2700.68 4866.09,2672.72 ccw(c4883.17,2689.79) v2@4883.17,2665.65 ; 4858.31,2680.5 ccw(c4881,2703.18) 4881,2671.1 cw(c4881,2703.18) 4858.31,2680.5
  other v2: 4881,2664
ADC1: P5.3 U3.10 | length 1463.3
  Top Layer w7: v1(4548,3257) 4564.77,3273.77 ; U3.10@4620.2,3273.77 4564.77,3273.77 ; 4564.77,3273.77 ccw(c4578,3260.54) 4559.42,3258.35 cw(c4578,3260.54) 4564.77,3273.77 ; 4564.77,3273.77 cw(c4551.54,3287) 4549.35,3268.42 ccw(c4551.54,3287) 4564.77,3273.77
  Top Layer w10: v1(4234,3497) 4234,3522 4310,3598 4310,3663 4351,3704 4397,3704 P5.3@4453,3760 ; 4234,3521.14 ccw(c4258.14,3521.14) 4241.07,3504.07 cw(c4258.14,3521.14) 4234,3521.14 ; 4234,3521.14 cw(c4209.86,3521.14) 4226.93,3504.07 ccw(c4209.86,3521.14) 4234,3521.14 ; 4405.37,3712.37 cw(c4460,3657.75) 4460,3735 ccw(c4460,3657.75) 4405.37,3712.37 ; 4422.27,3729.27 ccw(c4391.54,3760) 4435,3760 cw(c4391.54,3760) 4422.27,3729.27 ; 4422.44,3729.44 cw(c4460,3691.89) 4460,3745 ccw(c4460,3691.89) 4422.44,3729.44
  Bottom Layer w10: v1(4234,3497) 4234,3475 ; v1(4548,3257) 4548,3290 4498,3340 4369,3340 4234,3475 ; 4234,3475 ccw(c4214.8,3475) 4227.42,3489.47 cw(c4214.8,3475) 4234,3475 ; 4234,3475 cw(c4253.2,3475) 4240.58,3489.47 ccw(c4253.2,3475) 4234,3475 ; 4548,3281.14 ccw(c4572.14,3281.14) 4555.07,3264.07 cw(c4572.14,3281.14) 4548,3281.14 ; 4548,3281.14 cw(c4523.86,3281.14) 4540.93,3264.07 ccw(c4523.86,3281.14) 4548,3281.14
ADC2: P5.4 U3.14 | length 1683.2
  Top Layer w7: v1@4566,3147 4622,3147 4663.52,3188.52 U3.14@4663.52,3216.68 ; v1@4569.18,3138.82 cw(c4588.94,3119.07) 4588.94,3147 ccw(c4588.94,3119.07) v1@4569.18,3138.82 ; v1@4574.13,3133.87 cw(c4605.83,3102.17) 4605.83,3147 ccw(c4605.83,3102.17) v1@4574.13,3133.87 ; v1@4574.13,3150.13 ccw(c4581.69,3157.69) 4581.69,3147 cw(c4581.69,3157.69) v1@4574.13,3150.13
  Top Layer w10: P5.4@4560,3760 4560,3730 4532,3702 4434,3702 4410,3678 4410,3588 4398,3576 4372,3576 4296,3500 ; v1(4278,3500) ccw(c4278,3543.46) 4308.73,3512.73 cw(c4278,3543.46) v1(4278,3500) ; v1(4278,3500) 4296,3500 ; 4296,3500 ccw(c4296,3488.8) 4286.49,3494.72 cw(c4296,3488.8) 4296,3500 ; 4296,3500 cw(c4296,3511.2) 4286.49,3505.28 ccw(c4296,3511.2) 4296,3500 ; v1@4278,3510 ccw(c4278,3577.6) 4325.8,3529.8 cw(c4278,3577.6) v1@4278,3510
  Bottom Layer w10: v1@4270,3499 4277,3492 4277,3463 4384,3356 4526,3356 4584,3298 4584,3160 v1(4566,3142) ; 4583.07,3159.07 ccw(c4600.14,3142) 4576,3142 cw(c4600.14,3142) 4583.07,3159.07 ; 4583.07,3159.07 cw(c4566,3176.14) 4566,3152 ccw(c4566,3176.14) 4583.07,3159.07 ; v1@4270.93,3492.93 cw(c4256.27,3478.27) 4277,3478.27 ccw(c4256.27,3478.27) v1@4270.93,3492.93 ; 4277,3473.44 cw(c4304.56,3473.44) 4285.07,3492.93 ccw(c4304.56,3473.44) 4277,3473.44
ADC3: P5.5 U3.18 | length 1722.5
  Top Layer w7: U3.18@4718.64,3216.68 4718.64,3151.36 4738,3132 v1(4782,3132) ; 4754.24,3132 ccw(c4754.24,3159.76) 4773.87,3140.13 cw(c4754.24,3159.76) 4754.24,3132 ; 4754.24,3132 cw(c4754.24,3104.24) 4773.87,3123.87 ccw(c4754.24,3104.24) 4754.24,3132
  Top Layer w10: v1(4902,3718) 4929,3691 4929,3293 4946,3276 v1(4946,3268) ; 4919.07,3700.93 ccw(c4902,3683.86) 4902,3708 cw(c4902,3683.86) 4919.07,3700.93 ; 4919.07,3700.93 cw(c4936.14,3718) 4912,3718 ccw(c4936.14,3718) 4919.07,3700.93
  Bottom Layer w10: P5.5@4660,3760 4660,3780 4688,3808 ; v1(4782,3132) 4890,3132 4946,3188 v1(4946,3268) ; v1@4904,3719 4815,3808 4688,3808 ; 4688,3808 ccw(c4710.24,3785.75) 4682.25,3771.4 cw(c4710.24,3785.75) 4688,3808 ; 4806.14,3132 ccw(c4806.14,3107.86) 4789.07,3124.93 cw(c4806.14,3107.86) 4806.14,3132 ; 4806.14,3132 cw(c4806.14,3156.14) 4789.07,3139.07 ccw(c4806.14,3156.14) 4806.14,3132 ; 4946,3243.86 ccw(c4921.86,3243.86) 4938.93,3260.93 cw(c4921.86,3243.86) 4946,3243.86 ; 4946,3243.86 cw(c4970.14,3243.86) 4953.07,3260.93 ccw(c4970.14,3243.86) 4946,3243.86 ; P5.5@4673.35,3766.84 cw(c4697.41,3779.17) 4678.29,3798.29 ccw(c4697.41,3779.17) P5.5@4673.35,3766.84 ; 4882.81,3740.19 cw(c4860.62,3718) 4892,3718 ccw(c4860.62,3718) 4882.81,3740.19 ; 4890.05,3732.95 ccw(c4902,3744.9) 4902,3728 cw(c4902,3744.9) 4890.05,3732.95